# Altium PCB PCB.PcbDoc
Units mil, origin at the board's own origin, x right, y up, seen from the top; angles counter-clockwise.
Board outline 5540 x 3893 mil, 2 copper layers (Top Layer, Bottom Layer); 45 components, 44 nets, 213 pads, 20 vias.
Unrouted connection lines stored in the file: 2.
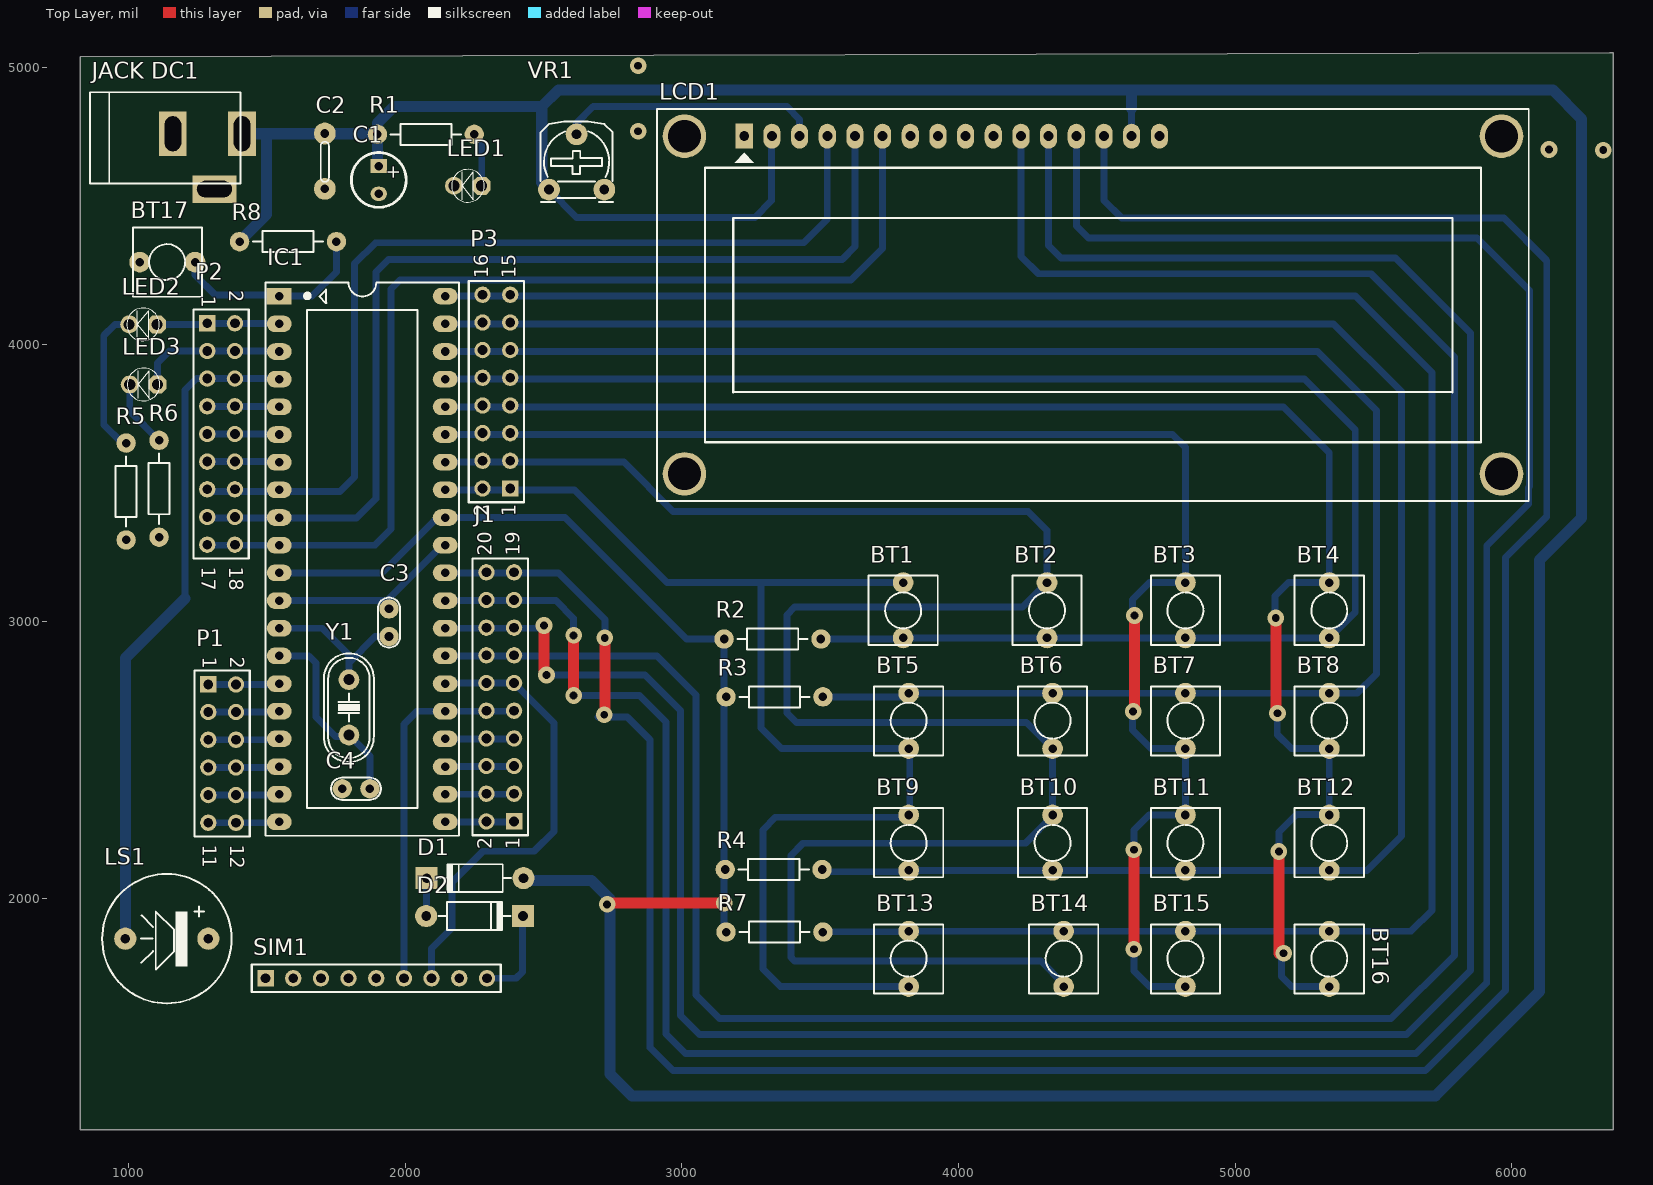
[diagram p0: Top Layer view]
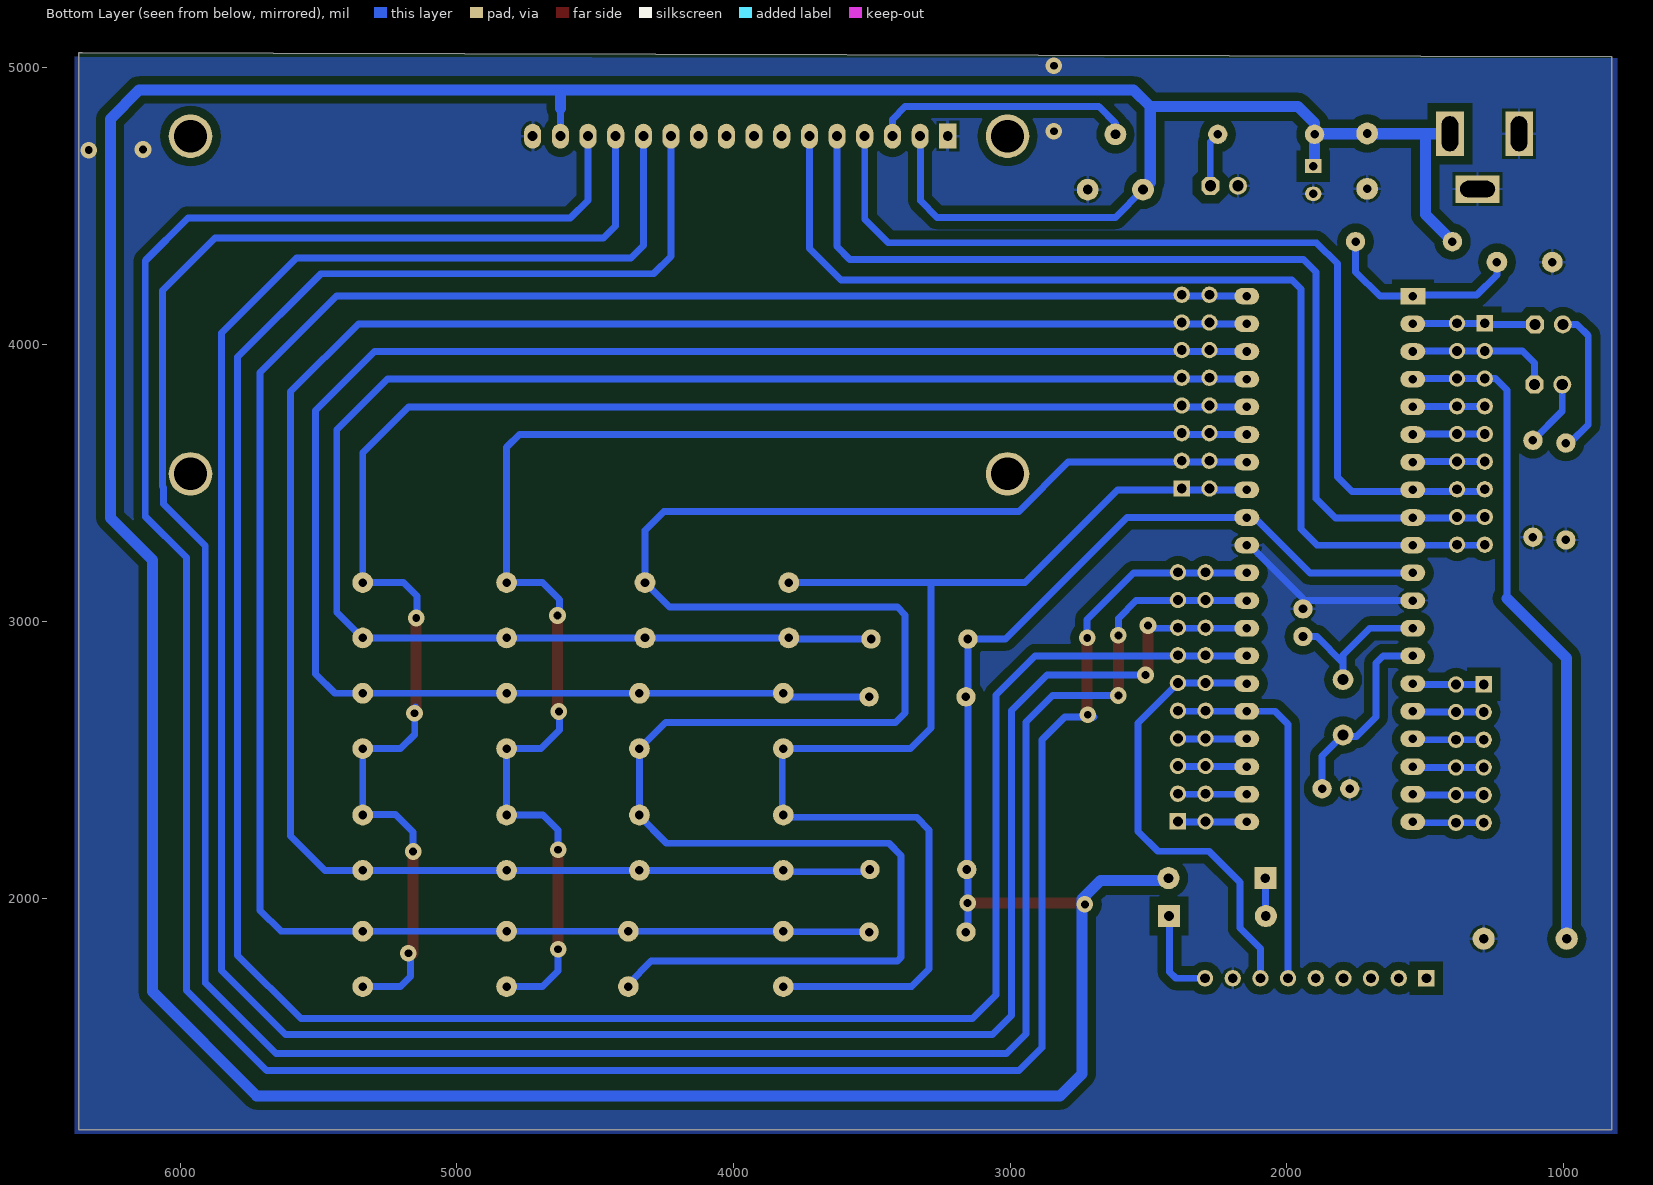
[diagram p1: Bottom Layer view, seen from below]

## Layer stack, top to bottom
Top Solder: solder mask 0.4, Solder Resist, Dk 3.5
Top Layer: signal copper 1.4
Dielectric 1: dielectric 12.6, FR-4, Dk 4.8
Bottom Layer: signal copper 1.4
Bottom Solder: solder mask 0.4, Solder Resist, Dk 3.5

## Board outline
827,5041 827,1162 6367,1162 6367,5055 6353,5055

## Design rules (kind name [scope] priority, off if disabled: settings)
Clearance [All] p1: gap=30
PolygonConnect [All] p1: connectstyle=Relief reliefconductorwidth=10 reliefentries=4 polygonreliefangle="90 Angle" airgapwidth=10
RoutingVias [All] p1: holewidth=28 width=50 viastyle="Through Hole" minholewidth=28 minwidth=50 maxholewidth=28 maxwidth=50
SolderMaskExpansion [All] p1: expansion=4
Width [All] p1: maxlimit=45 minlimit=40 preferedwidth=40
30 further rules are at their usual default settings.

## Components (designator, comment, footprint, x,y, rotation, side; value= is the part's Value field where it differs from the comment)
BT1 "Nut Nhan 2 Chan" "Nut Nhan 2 Chan" 3800,2940 r90 top
BT2 "Nut Nhan 2 Chan" "Nut Nhan 2 Chan" 4320,2940 r90 top
BT3 "Nut Nhan 2 Chan" "Nut Nhan 2 Chan" 4820,2940 r90 top
BT4 "Nut Nhan 2 Chan" "Nut Nhan 2 Chan" 5340,2940 r90 top
BT5 "Nut Nhan 2 Chan" "Nut Nhan 2 Chan" 3820,2740 r270 top
BT6 "Nut Nhan 2 Chan" "Nut Nhan 2 Chan" 4340,2740 r270 top
BT7 "Nut Nhan 2 Chan" "Nut Nhan 2 Chan" 4820,2740 r270 top
BT8 "Nut Nhan 2 Chan" "Nut Nhan 2 Chan" 5340,2740 r270 top
BT9 "Nut Nhan 2 Chan" "Nut Nhan 2 Chan" 3820,2100 r90 top
BT10 "Nut Nhan 2 Chan" "Nut Nhan 2 Chan" 4340,2100 r90 top
BT11 "Nut Nhan 2 Chan" "Nut Nhan 2 Chan" 4820,2100 r90 top
BT12 "Nut Nhan 2 Chan" "Nut Nhan 2 Chan" 5340,2100 r90 top
BT13 "Nut Nhan 2 Chan" "Nut Nhan 2 Chan" 3820,1880 r270 top
BT14 "Nut Nhan 2 Chan" "Nut Nhan 2 Chan" 4380,1880 r270 top
BT15 "Nut Nhan 2 Chan" "Nut Nhan 2 Chan" 4820,1880 r270 top
BT16 "Nut Nhan 2 Chan" "Nut Nhan 2 Chan" 5340,1880 r270 top
BT17 "Nut Nhan 2 Chan" "Nut Nhan 2 Chan" 1041,4298 r0 top
C1 "Cap Pol 5mm" C5mm 1905,4595 r270 top
C2 "104" Tu-ceramic 1710,4563 r90 top
C3 "100pF" CN1 1942,2945 r90 top
C4 "100pF" CN1 1873,2395 r180 top
D1 "Diode Cam" "Diode Cam" 2428,2072 r0 top
D2 "Diode Cam" "Diode Cam" 2076,1935 r180 top
IC1 "PIC 18F4520" DIP40/W0.6 1545,4175 r270 top
J1 "JP10X2" HDR2X10 2394,2277 r90 top
"JACK DC1" "JACK DC 5.5" "JACK DC 5.5" 1286,4662 r0 top
LCD1 "LCD16x2A" LCD16X2 4486,4143 r0 top
LED1 "LED" LED-3MM-YELLOW 2277,4574 r180 top
LED2 "LED" LED-3MM-YELLOW 1103,4073 r180 top
LED3 "LED" LED-3MM-YELLOW 1105,3856 r180 top
LS1 "Speaker" SPK 1289,1853 r180 top
P1 "JP6X2" HDR2X6 1289,2772 r270 top
P2 "JP9X2" HDR2X9 1285,4077 r270 top
P3 "JP8X2" HDR2X8 2380,3480 r90 top
R1 "RES 1/4W" "Tro 1/4W" 1900,4760 r0 top
R2 "RES 1/4W" "Tro 1/4W" 3153,2936 r0 top
R3 "RES 1/4W" "Tro 1/4W" 3160,2727 r0 top
R4 "RES 1/4W" "Tro 1/4W" 3157,2103 r0 top
R5 "RES 1/4W" "Tro 1/4W" 992,3294 r90 top
R6 "RES 1/4W" "Tro 1/4W" 1111,3304 r90 top
R7 "RES 1/4W" "Tro 1/4W" 3160,1877 r0 top
R8 "RES 1/4W" "Tro 1/4W" 1752,4372 r180 top
SIM1 "SIM" "JUMP DON 9" 1496,1710 r0 top
VR1 "Bien Tro Tam Giac" "VR-TAM GIAC" 2520,4560 r0 top
Y1 "20MHz" "Thach anh 2 chan" 1797,2689 r90 top

## Footprints (in the part's own frame and the unit in brackets; to place one, negate y for a bottom-side part, rotate by r counter-clockwise, add the part's x,y. Pads: shape width x height; smd on the part's side, far side on the other; paste and mask are expansions set on the pad)
C5mm [mm]
  rect 1.3x1.5 hole 0.8: 1(-1.27,0)
  oval 1.3x1.5 hole 0.8: 2(1.27,0)
  silkscreen extent -2.51,-2.51 2.51,2.51, body extent -2.5,-2.5 2.49,2.5, height 11.01
CN1 [mil]
  round 70 hole 31: 1(0,0) 2(100,0)
  silkscreen extent -40,-40 141,40, body extent -60,-30 170,37, height 265
"Diode Cam" [mil] "Diode 1A, W 100mil, L 350mil"
  round 80 hole 35: 1(0,0)
  rect 80x80 hole 35: 2(-350,0)
  silkscreen extent -305,-50 -45,50, body extent -386,-33 34,36, height 84
DIP40/W0.6 [mil] "40 PIN, W 600mil, Pin to pin 100mil"
  rect 60x90 hole 31: 1(0,0)
  oval 60x90 hole 31: 2(100,0) 3(200,0) 4(300,0) 5(400,0) 6(500,0) 7(600,0) 8(700,0) 9(800,0) 10(900,0) 11(1000,0) 12(1100,0) 13(1200,0) 14(1300,0) 15(1400,0) 16(1500,0) 17(1600,0) 18(1700,0) 19(1800,0) 20(1900,0) 21(1900,600) 22(1800,600) 23(1700,600) 24(1600,600) 25(1500,600) 26(1400,600) 27(1300,600) 28(1200,600) 29(1100,600) 30(1000,600) 31(900,600) 32(800,600) 33(700,600) 34(600,600) 35(500,600) 36(400,600) 37(300,600) 38(200,600) 39(100,600) 40(0,600)
  silkscreen extent -50,-50 1950,650, body extent -82,-10 1982,600, height 224
HDR2X6 [mm] "Connector; Header; 6x2 Position"
  rect 1.5x1.5 hole 0.9: 1(0,0)
  round 1.5 hole 0.9: 2(0,2.54) 3(2.54,0) 4(2.54,2.54) 5(5.08,0) 6(5.08,2.54) 7(7.62,0) 8(7.62,2.54) 9(10.16,0) 10(10.16,2.54) 11(12.7,0) 12(12.7,2.54)
  silkscreen extent -1.27,-1.27 13.97,3.81, body extent -1.27,-1.27 13.97,3.81, height 7
HDR2X8 [mm] "Connector; Header; 8x2 Position"
  rect 1.5x1.5 hole 0.9: 1(0,0)
  round 1.5 hole 0.9: 2(0,2.54) 3(2.54,0) 4(2.54,2.54) 5(5.08,0) 6(5.08,2.54) 7(7.62,0) 8(7.62,2.54) 9(10.16,0) 10(10.16,2.54) 11(12.7,0) 12(12.7,2.54) 13(15.24,0) 14(15.24,2.54) 15(17.78,0) 16(17.78,2.54)
  silkscreen extent -1.27,-1.27 19.05,3.81, body extent -1.27,-1.27 19.05,3.81, height 1.5
HDR2X9 [mm] "Connector; Header; 9x2 Position"
  rect 1.5x1.5 hole 0.9: 1(0,0)
  round 1.5 hole 0.9: 2(0,2.54) 3(2.54,0) 4(2.54,2.54) 5(5.08,0) 6(5.08,2.54) 7(7.62,0) 8(7.62,2.54) 9(10.16,0) 10(10.16,2.54) 11(12.7,0) 12(12.7,2.54) 13(15.24,0) 14(15.24,2.54) 15(17.78,0) 16(17.78,2.54) 17(20.32,0) 18(20.32,2.54)
  silkscreen extent -1.27,-1.27 21.59,3.81, body extent -1.27,-1.27 21.59,3.81, height 1.5
HDR2X10 [mm] "Connector; Header; 10x2 Position"
  rect 1.5x1.5 hole 0.9: 1(0,0)
  round 1.5 hole 0.9: 2(0,2.54) 3(2.54,0) 4(2.54,2.54) 5(5.08,0) 6(5.08,2.54) 7(7.62,0) 8(7.62,2.54) 9(10.16,0) 10(10.16,2.54) 11(12.7,0) 12(12.7,2.54) 13(15.24,0) 14(15.24,2.54) 15(17.78,0) 16(17.78,2.54) 17(20.32,0) 18(20.32,2.54) 19(22.86,0) 20(22.86,2.54)
  silkscreen extent -1.27,-1.27 24.13,3.81, body extent -1.14,-1.4 24.13,3.81, height 1.5
"JACK DC 5.5" [mil] "Jac DC input"
  rect 100x160 hole 59.06 slot 125.98 at 90 deg: 1(125,100) 2(-125,100)
  rect 160x100 hole 59.06 slot 125.98 at 0 deg: 3(25,-100)
  silkscreen extent -425,-80 120,250, body extent -410,-105 134,269, height 434
"JUMP DON 9" [mm] "Connector; Header; 9 Position"
  rect 1.5x1.5 hole 0.9: 1(0,0)
  round 1.5 hole 0.9: 2(2.54,0) 3(5.08,0) 4(7.62,0) 5(10.16,0) 6(12.7,0) 7(15.24,0) 8(17.78,0) 9(20.32,0)
  silkscreen extent -1.27,-1.27 21.59,1.27, body extent -1.27,-1.27 21.59,1.27, height 7
LCD16X2 [mil] "LCD dipslay 16x2, 16 pin"
  rect 62x90 hole 36: 1(-1260.16,610.24)
  oval 62x90 hole 36: 2(-1160.16,610.24) 3(-1060.16,610.24) 4(-960.16,610.24) 5(-860.16,610.24) 6(-760.16,610.24) 7(-660.16,610.24) 8(-560.16,610.24) 9(-460.16,610.24) 10(-360.16,610.24) 11(-260.16,610.24) 12(-160.16,610.24) 13(-60.16,610.24) 14(39.84,610.24) 15(139.84,610.24) 16(239.84,610.24)
  round 157.48 hole 118.11: "Hole 0"(-1476.38,-610.24) "Hole 0"(-1476.38,610.24) "Hole 0"(1476.38,-610.24) "Hole 0"(1476.38,610.24)
  silkscreen extent -1575,-709 1575,709, body extent -1575,-709 1575,709, height 434
LED-3MM-YELLOW [mil]
  oct 65x65 hole 40: 1(0,0)
  round 65 hole 40: 2(100,0)
  silkscreen extent -9,-59 109,59, body extent -27,-77 117,80, height 181
"Nut Nhan 2 Chan" [mil] "SW button 2pin, 250x 250 mil"
  round 75 hole 31: 1(0,0) 2(200,0)
  silkscreen extent -25,-125 225,125
SPK [mil] "Speaker Chip"
  round 80 hole 35: 1(0,0) 2(300,0)
  silkscreen extent -84,-234 384,234
"Thach anh 2 chan" [mm] "Footpin for Crystal 2 pin"
  round 1.905 hole 1: 1(-2.54,0) 2(2.54,0)
  silkscreen extent -5.03,-2.29 4.96,2.29, body extent -5.93,-2.36 5.42,2.29, height 3.5
"Tro 1/4W" [mil] "Tro 1/4W"
  round 70 hole 31: 1(0,0) 2(350,0)
  silkscreen extent 48,-38 302,38, body extent -40,-47 386,47, height 111
Tu-ceramic [mm] "Tu gom mini"
  round 2 hole 0.8: 1(0,0) 2(5.08,0)
  silkscreen extent 0.64,-0.38 4.32,0.38, body extent -0.38,-0.85 5.46,0.85, height 6.12
"VR-TAM GIAC" [mm] "Resistor Variable"
  round 2 hole 0.9: 1(0,0) 2(2.54,5.08) 3(5.08,0)
  silkscreen extent -0.79,-1.12 5.87,6.25, body extent -2.21,-0.76 7.79,9.44, height 4.2

## Part data
C1: "Polarized Capacitor (Axial)"
C2: library part "CAP 104-TANTALUM"
C3 C4: library part CN1, "Cap np  1pF - 472pF"
IC1: "32KB Flash, 1536B RAM, 256B EFROM, 40-Pin PDIP"
J1: library part "JUMP DOI-10P", "JUMP DOI DUC THANG"
LCD1: library part LCD16X2, "JUMP DON CAI"
LED1 LED2 LED3: "LED Single colour Green and Red"
LS1: "Loudspeaker"
P1: library part "JUMP DOI-6", "JUMP DOI DUC THANG"
P2: library part "JUMP DOI-9P", "JUMP DOI DUC THANG"
P3: library part "JUMP DOI-8P", "JUMP DOI DUC THANG"
R1 R2 R3 R4 R5 R6 R7 R8: "Tro 1/4W"
SIM1: library part SIM800C
Y1: library part "Thach Anh Cam", "Thach Anh Cam"

## Via types
v1: diameter 60, hole 28, Top Layer to Bottom Layer, 20 vias

## Nets (pads, with @x,y where several pads share a name; then routed paths per layer and width w, separated by ;. In a path a pad name is that pad's centre, name@x,y a point inside that pad or via, vN(x,y) a via of type N, cw(c..) or ccw(c..) an arc to the next point about the centre after c; other vN are vias at no path point)
2: IC1.2 LED2.1 P2.1 P2.2 | length 444.5
  Bottom Layer w25: LED2.1 1281,4073 P2.1 P2.2 1543,4077 IC1.2
3: IC1.3 LED3.1 P2.3 P2.4 | length 536.6
  Bottom Layer w25: LED3.1 1105,3934 1148,3977 P2.3 P2.4 1543,3977 IC1.3
4: IC1.4 LS1.2 P2.5 P2.6 | length 2427.5
  Bottom Layer w25: 1205,3083 1205,3836 1246,3877 P2.5 P2.6 IC1.4@1543,3877
  Bottom Layer w40: LS1.2 989,2867 1205,3083
5: IC1.5 P2.7 P2.8 | length 260.8
  Bottom Layer w25: P2.7 P2.8 1543,3777 IC1.5
6: IC1.6 P2.9 P2.10 | length 260.8
  Bottom Layer w25: P2.9 P2.10 1543,3677 IC1.6
7: IC1.7 P2.11 P2.12 | length 269.3
  Bottom Layer w25: P2.11@1285,3569 P2.11@1291,3575 ; P2.11 P2.12 1543,3577 IC1.7
8: IC1.8 LCD1.4 P2.13 P2.14 | length 3399.8
  Bottom Layer w25: P2.13@1285,3469 1385,3469 1765,3469 1818,3522 1818,4293 1893,4368 3440,4368 3525.84,4453.84 LCD1.4
9: IC1.9 LCD1.5 P2.15 P2.16 | length 3629.8
  Bottom Layer w25: P2.15@1285,3380 1292,3373 1825,3373 1895,3443 1895,4263 1940,4308 3580,4308 3625.84,4353.84 LCD1.5
10: IC1.10 LCD1.6 P2.17 P2.18 | length 3801.2
  Bottom Layer w25: P2.17@1285,3280 1290,3275 IC1.10 1891,3275 1949,3333 1949,4201 1982,4234 3612,4234 3725.84,4347.84 LCD1.6
13: C3.1 IC1.13 Y1.2 | length 565.5
  Bottom Layer w25: IC1.13 1700,2975 1797,2878 1797,2850 ; Y1.2 1797,2850 ; C3.1 1892,2945 1797,2850
14: C4.1 IC1.14 Y1.1 | length 714.3
  Bottom Layer w25: IC1.14 1652,2875 1678,2849 1678,2654 1748,2584 1792,2584 Y1.1 1873,2513 C4.1
15: IC1.15 P1.1 P1.2 | length 253
  Bottom Layer w25: P1.1 P1.2 IC1.15@1542,2772
16: IC1.16 P1.3 P1.4 | length 257.2
  Bottom Layer w25: P1.3 P1.4 1542,2672 IC1.16
17: IC1.17 P1.5 P1.6 | length 253
  Bottom Layer w25: P1.5 P1.6 IC1.17@1542,2572
18: IC1.18 P1.7 P1.8 | length 253
  Bottom Layer w25: P1.7 P1.8 IC1.18@1542,2472
19: IC1.19 P1.9 P1.10 | length 253
  Bottom Layer w25: P1.9 P1.10 IC1.19@1542,2372
20: IC1.20 P1.11 P1.12 | length 257.2
  Bottom Layer w25: P1.11 P1.12 1542,2272 IC1.20
21: IC1.21 J1.1 J1.2 | length 249.8
  Bottom Layer w25: IC1.21 2392,2275 J1.1
22: IC1.22 J1.3 J1.4 | length 247
  Bottom Layer w25: IC1.22 J1.3@2392,2375
23: IC1.23 J1.5 J1.6 | length 247
  Bottom Layer w25: IC1.23 J1.5@2392,2475
24: IC1.24 J1.7 J1.8 | length 247
  Bottom Layer w25: IC1.24 J1.7@2392,2575
25: IC1.25 J1.9 J1.10 SIM1.6 | length 1336.3
  Bottom Layer w25: SIM1.6 1996,2628 2043,2675 IC1.25 2392,2675 J1.9
26: IC1.26 J1.11 J1.12 SIM1.7 | length 1667.3
  Bottom Layer w25: SIM1.7 2096,1817 2170,1891 2170,2057 2282,2169 2466,2169 2538,2241 2538,2633 J1.11 J1.12 2147,2777 IC1.26
27: IC1.27 J1.13 J1.14 LCD1.11 | length 9233
  Bottom Layer w25: IC1.27 2910,2875 3052,2733 3052,1649 3137,1564 5563,1564 5792,1793 5792,3955 5491,4256 4289,4256 4225.84,4319.16 LCD1.11
28: IC1.28 J1.15 J1.16 LCD1.12 | length 9521.6
  Top Layer w40: v1(2502,2985) 2502,2806 v1(2511,2806)
  Bottom Layer w25: IC1.28 2501,2975 v1@2511,2985 ; v1@2520,2806 2867,2806 2995,2678 2995,1576 3064,1507 5619,1507 5850,1738 5850,4042 5579,4313 4371,4313 4325.84,4358.16 LCD1.12
29: IC1.29 J1.17 J1.18 LCD1.13 | length 9997.4
  Top Layer w40: v1(2609,2732) v1(2609,2949)
  Bottom Layer w25: IC1.29 2545,3075 2609.5,3010.5 2609,3010 v1(2609,2949) ; v1(2609,2732) 2847,2732 2943,2636 2943,1508 3013,1438 5654,1438 5909,1693 5909,3273 6060,3424 6060,3483.59 6063.62,3487.21 6063.62,4195.38 5874,4385 4470,4385 4425.84,4429.16 LCD1.13
30: IC1.30 J1.19 J1.20 LCD1.14 | length 10197.4
  Top Layer w40: v1(2720,2662) 2722,2662 v1(2722,2940) v1@2720,2940
  Bottom Layer w25: IC1.30 2554,3175 2722,3007 v1(2722,2940) ; v1@2698,2654 2803,2654 2885,2572 2885,1459 2968,1376 5687,1376 5977,1666 5977,3230 6126,3379 6126,4303 5972,4457 4590,4457 4525.84,4521.16 LCD1.14
33: BT1.2 BT5.2 BT9.2 BT13.2 IC1.33 P3.1 P3.2 | length 4740.4
  Bottom Layer w25: IC1.33 2612,3475 2947,3140 3277,3140 ; BT1.2 3277,3140 ; BT13.2 3356,1680 3293,1743 3293,2246 3339,2292 3818,2292 3824,2298 3824,2536 BT5.2 3360,2540 3286,2614 3286,3131 3277,3140
34: BT2.2 BT6.2 BT10.2 BT14.2 IC1.34 P3.3 P3.4 | length 7478.5
  Bottom Layer w25: IC1.34 2791,3575 2969,3397 4252,3397 4320,3329 BT2.2 4231,3051 3408,3051 3380,3023 3380,2669 3414,2635 4245,2635 BT6.2 4340,2306 4345,2301 4242,2198 3438,2198 3394,2154 3394,1786 3408,1772 4298,1772 4380,1690 BT14.2
35: BT3.2 BT7.2 BT11.2 BT15.2 IC1.35 P3.5 P3.6 | length 5317.7
  Top Layer w40: v1(4631,2674) 4636,2674 v1(4636,3021) ; v1(4634,1815) v1(4634,2174)
  Bottom Layer w25: IC1.35 4774,3675 4820,3629 BT3.2 4691,3140 4629,3078 v1@4629,3012 ; v1@4624,2164 v1(4634,2174) 4634,2246 4688,2300 BT11.2 4840,2300 4820,2320 BT7.2 4696,2540 4629,2607 v1@4629,2674 ; v1@4631,1818 v1(4634,1815) 4634,1736 4690,1680 BT15.2
36: BT4.2 BT8.2 BT12.2 BT16.2 IC1.36 P3.7 P3.8 | length 5883
  Top Layer w40: v1(5147,3012) 5147,2668 v1(5153,2668) ; v1@5158,1800 v1(5158,2168)
  Bottom Layer w25: IC1.36 5174,3775 5340,3609 BT4.2 5193,3140 5144,3091 5144,2999 v1@5147,2996 ; v1@5149,2691 5152,2688 5152,2591 5203,2540 BT8.2 5340,2302 5222,2302 5158,2238 v1(5158,2168) ; v1@5174,1818 5167,1811 5167,1716 5203,1680 BT16.2
  other v1: 5175,1800
37: BT1.1 BT2.1 BT3.1 BT4.1 IC1.37 P3.9 P3.10 R2.2 | length 5988.7
  Bottom Layer w25: IC1.37 5251,3875 5434,3692 5434,3034 BT4.1 BT3.1 BT2.1 BT1.1 ; R2.2 BT1.1@3796,2936
38: BT5.1 BT6.1 BT7.1 BT8.1 IC1.38 P3.11 P3.12 R3.2 | length 6439.6
  Bottom Layer w25: IC1.38 5297,3975 5510,3762 5510,2810 5440,2740 BT8.1 BT7.1 BT6.1 BT5.1 3807,2727 R3.2
39: BT9.1 BT10.1 BT11.1 BT12.1 IC1.39 P3.13 P3.14 R4.2 | length 7292.9
  Bottom Layer w25: IC1.39 5356,4075 5601,3830 5601,2224 5477,2100 BT12.1 BT11.1 BT10.1 BT9.1 3815,2095 R4.2@3525,2095
40: BT13.1 BT14.1 BT15.1 BT16.1 IC1.40 P3.15 P3.16 R7.2 | length 7845.2
  Bottom Layer w25: IC1.40 5435,4175 5711,3899 5711,1955 5636,1880 BT16.1 BT15.1 BT14.1 BT13.1 3818,1878 R7.2@3522,1878
GND: "JACK DC1.2" "JACK DC1.3" BT17.1 C1.2 C2.1 C3.2 C4.2 IC1.12 IC1.31 LCD1.1 LCD1.16 LED1.2 LS1.1 R5.1 R6.1 SIM1.8 VR1.3 | length 717.4
  Bottom Layer w25: IC1.12 1545,3075.5 C3.2@1942,3075.5 ; C3.2 C3.2@1942,3075.5 ; IC1.31 2135,3275 1942,3082 C3.2@1942,3075.5
  other v1: 6330,4703 6134,4705 2842,4771 2842,5008
NetD1_2: D1.2 D2.1 | length 135
  Bottom Layer w25: D2.1@2078,1937 D1.2
NetLCD1_3: LCD1.3 VR1.2 | length 950.6
  Bottom Layer w25: VR1.2 2620,4800 2680,4860 3380,4860 3425.84,4814.16 LCD1.3
NetLED1_1: LED1.1 R1.2 | length 197.2
  Bottom Layer w25: R1.2 2277,4733 LED1.1
NetLED2_2: LED2.2 R5.2 | length 538.7
  Bottom Layer w25: R5.2 978,3644 911,3711 911,4032 952,4073 LED2.2
NetLED3_2: LED3.2 R6.2 | length 245.9
  Bottom Layer w25: LED3.2 1005,3760 R6.2
RST: BT17.2 IC1.1 R8.1 | length 734.3
  Bottom Layer w25: BT17.2 1241,4252 1314,4179 1541,4179 IC1.1 1664,4175 1752,4263 R8.1
VCC: "JACK DC1.1" C1.1 C2.2 D1.1 IC1.11 IC1.32 LCD1.2 LCD1.15 R1.1 R2.1 R3.1 R4.1 R7.1 R8.2 VR1.1 | length 18204.3
  Top Layer w40: v1(2730,1977) 2730,1982 v1(3154,1982)
  Bottom Layer w25: IC1.11 1917,3175 2117,3375 IC1.32 2578,3375 3017,2936 R2.1 3153,1897 R7.1@3172,1878 ; VR1.1 2620,4460 3265,4460 3325,4520 3325,4752.39 LCD1.2 ; LCD1.15 4625.84,4854.16
  Bottom Layer w40: R8.2 1500,4470 1500,4762 ; 1411,4762 1500,4762 ; C1.1@1900,4650 R1.1 ; D1.1 2437,2063 2674,2063 2741,1996 2741,1364 2820,1285 5723,1285 6099.5,1661.5 6099.5,3221.5 6252,3374 6252,4816 6148,4920 2554,4920 2494,4860 ; VR1.1 2494,4586 2494,4860 ; 4625.84,4854.16 4625.84,4917.84 ; 1500,4762 1898,4762 R1.1 ; R1.1 1900,4800 1960,4860 2494,4860
VSIM: D2.2 SIM1.9 | length 340.4
  Bottom Layer w25: SIM1.9 2401,1710 2424,1733 2424,1933 D2.2
pads on no net: "LCD1.Hole 0" LCD1.7 LCD1.8 LCD1.9 LCD1.10 SIM1.1 SIM1.2 SIM1.3 SIM1.4 SIM1.5

## Polygon pours and split planes (outlines as drawn)
GND on Bottom Layer "Top Layer-No Net" (solid, remove dead copper, pour order 2): 806,5034 806,1148 6381,1148 6381,5041 6367,5041

## Text inside footprints (layer, text, board x,y; h text height)
C1: Top Overlay "+" at 1938,4650 h47.24 r270
J1: Top Overlay "20" at 2314,3237 h50 r90; Top Overlay "19" at 2414,3237 h50 r90; Top Overlay "1" at 2414,2177 h50 r90; Top Overlay "2" at 2314,2177 h50 r90
P1: Top Overlay "2" at 1369,2872 h50 r270; Top Overlay "1" at 1269,2872 h50 r270; Top Overlay "1" at 1269,2192 h50 r270; Top Overlay "1" at 1269,2152 h50 r270; Top Overlay "12" at 1369,2192 h50 r270
P2: Top Overlay "2" at 1365,4197 h50 r270; Top Overlay "1" at 1265,4177 h50 r270; Top Overlay "17" at 1265,3197 h50 r270; Top Overlay "18" at 1365,3197 h50 r270
P3: Top Overlay "2" at 2300,3380 h50 r90; Top Overlay "1" at 2400,3380 h50 r90; Top Overlay "15" at 2400,4240 h50 r90; Top Overlay "16" at 2300,4240 h50 r90